# EAGLE board Bottom (EAGLE 7.6.0)
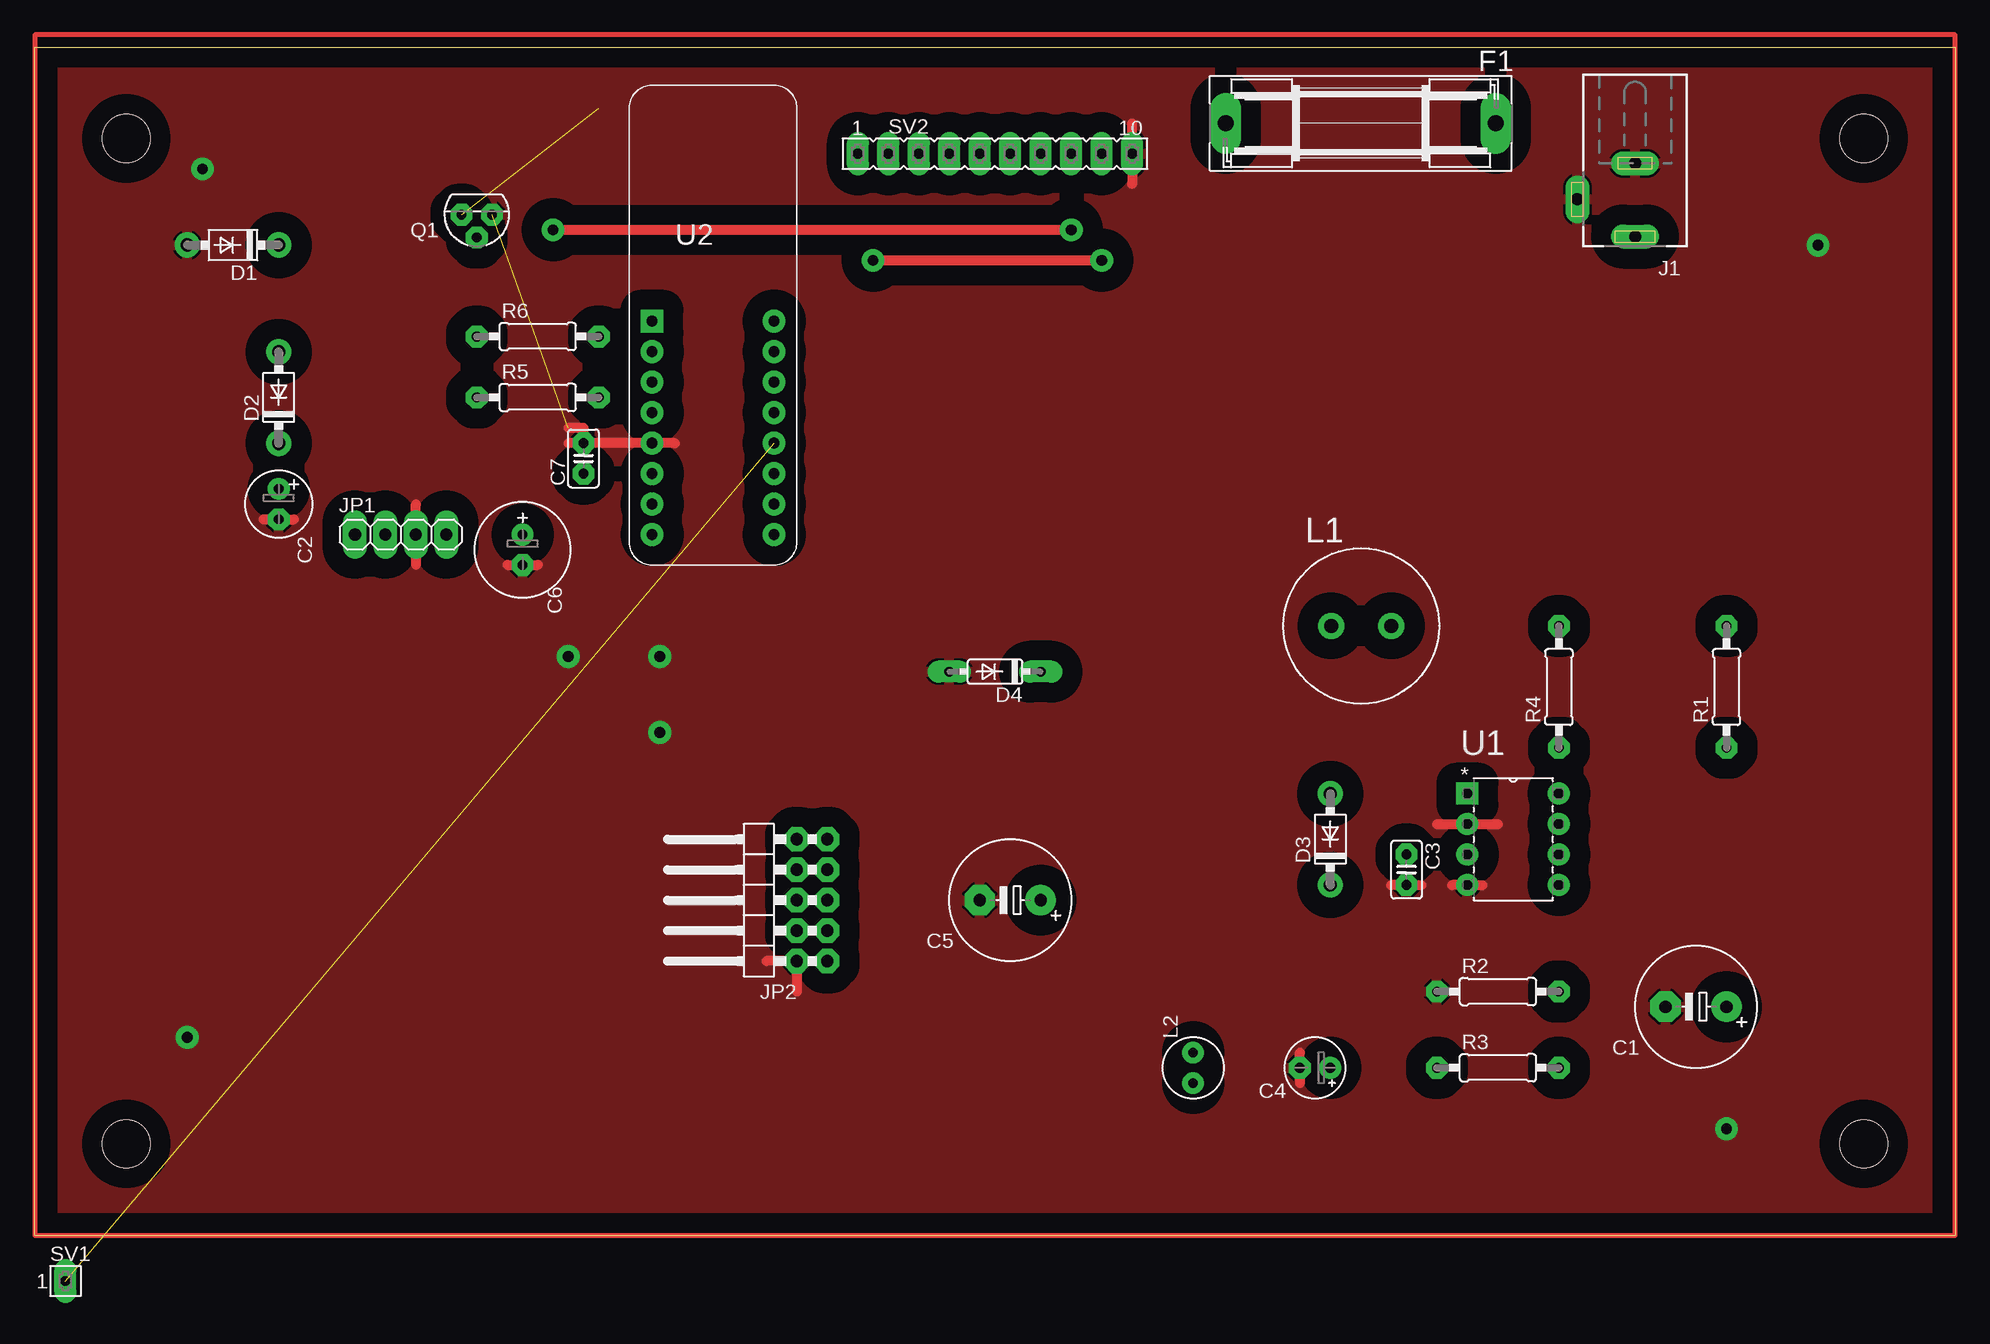
[diagram p0: board, top side]
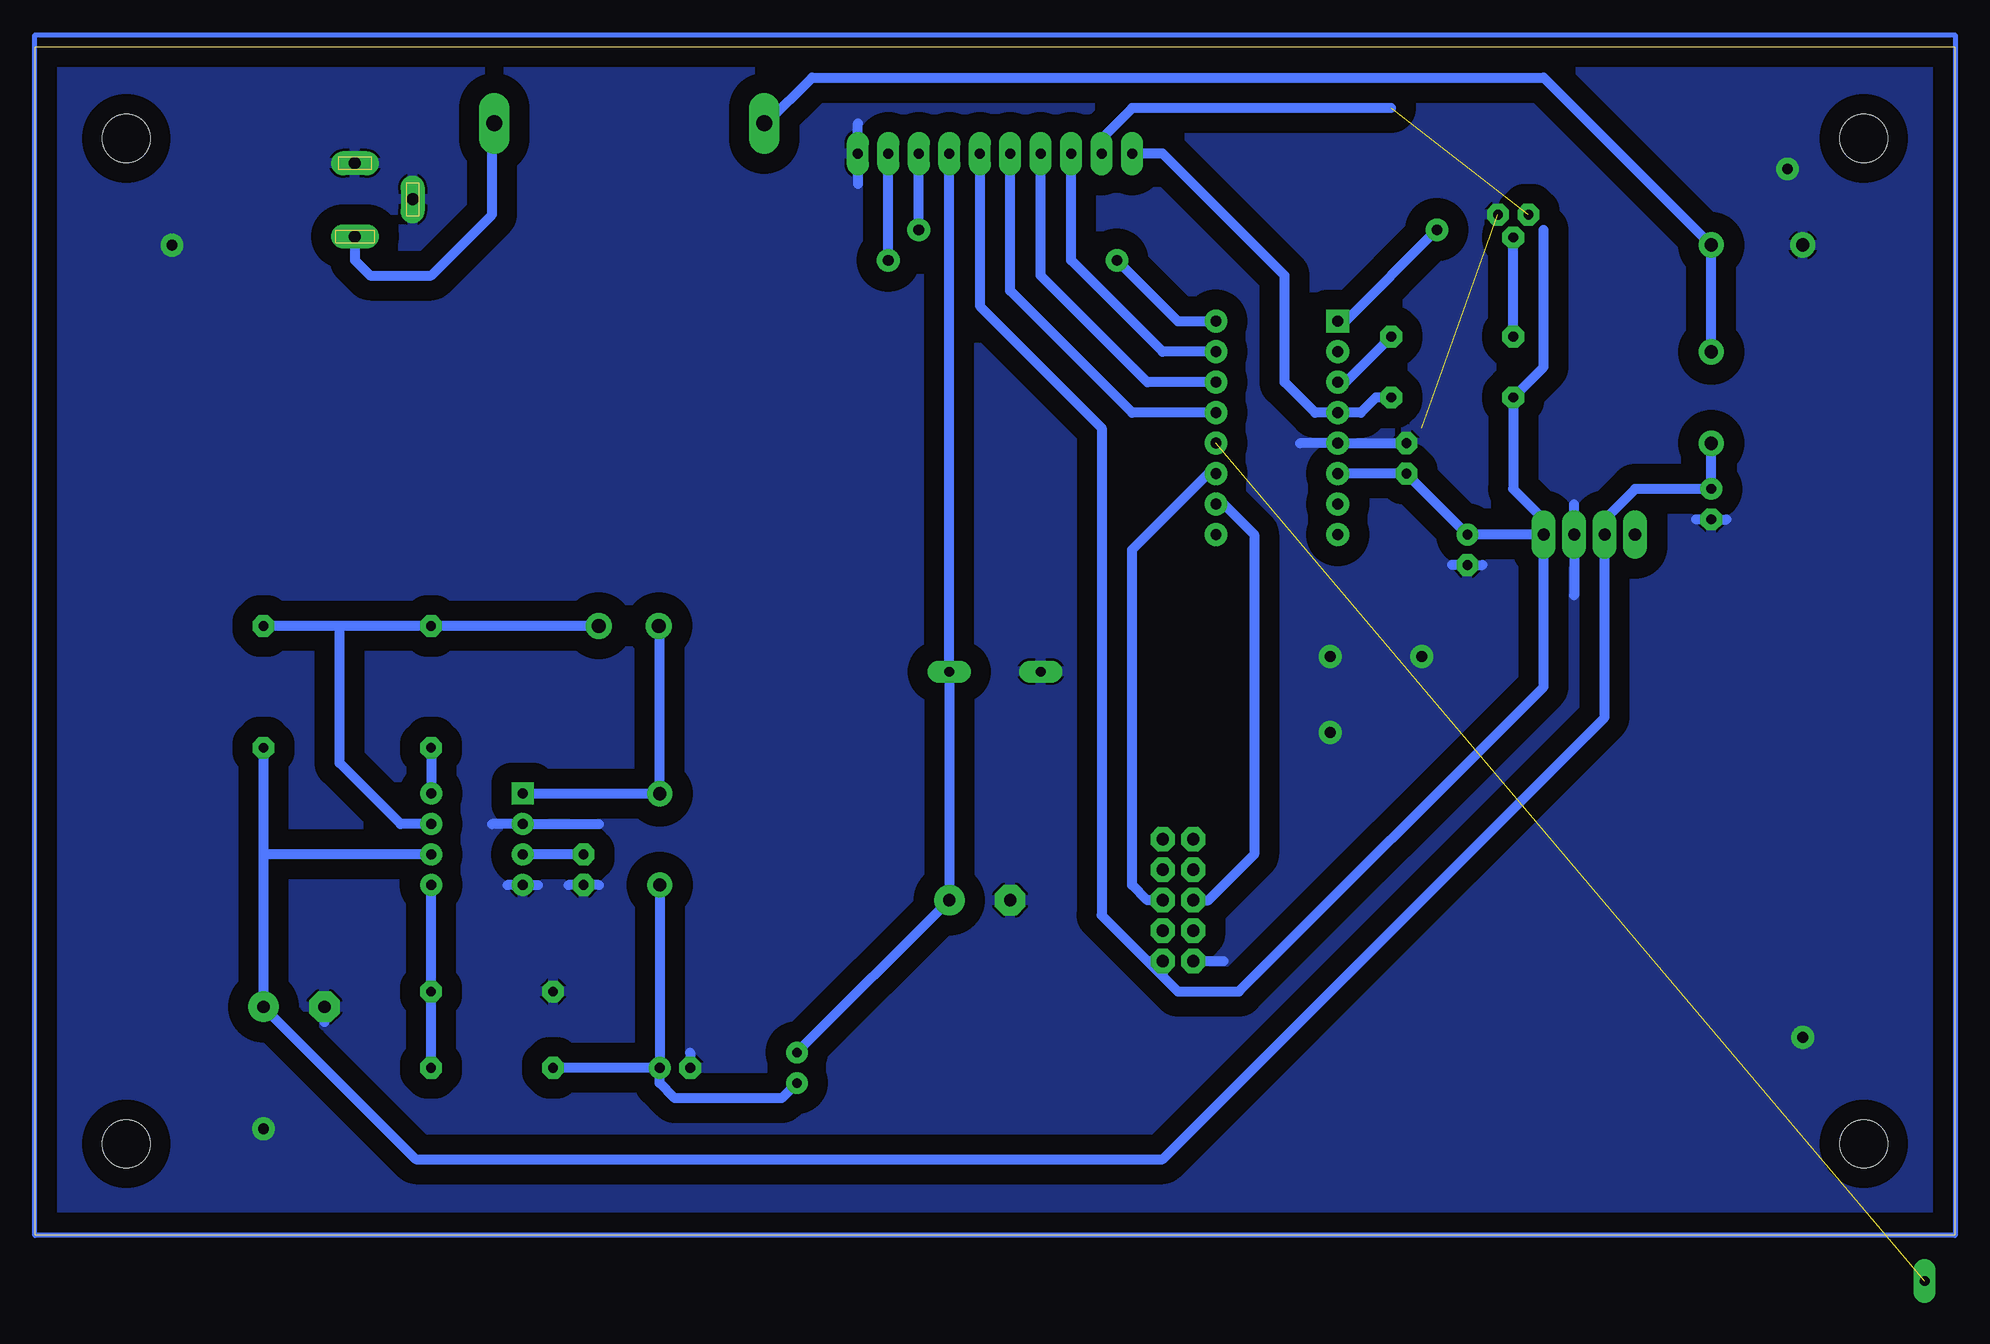
[diagram p1: board, bottom side, seen from below]

Size 160.02 x 99.06 mm. Coordinates in mm from the lower left corner, seen from the top.
Outline: 160,0 0,0 0,99.06 160.02,99.06 160.02,0
Copper layers (1*16): Top 0.035mm / dielectric 1.5mm / Bottom 0.035mm
Design rules "Line_Follower_Rules2": minimum track width 0.25mm, minimum drill 0.8mm, track to track 0.25mm, track to pad 0.25mm, pad to pad 0.25mm, via to via 0.25mm, smd to smd 5mil, copper to edge 1mm, drill to drill 0.5mm, minimum pad ring 0.5mm, minimum via ring 0.5mm, stop-mask expansion 4mil, vias tented up to drill 0mil, thermal gap 0.2mm
Holes 4 mm at 7.62,91.44 7.62,7.62 152.4,7.62 152.4,91.44

## Footprints (pad centres in the part's own frame; a part is rotated, then mirrored left to right if it is on the bottom)
E5-10 = drill 1.016 pad 2.54: + -2.54,0 | drill 1.016 pad 2.54 octagon: - 2.54,0
E2,5-6 = drill 0.813 pad 1.6: + -1.27,0 | drill 0.813 pad 1.6 octagon: - 1.27,0
C025-025X050 = drill 0.813 octagon: 1 -1.27,0; 2 1.27,0
E2,5-5 = drill 0.813 pad 1.6: + -1.27,0 | drill 0.813 pad 1.6 octagon: - 1.27,0
E2,5-8 = drill 0.813 pad 1.6: + -1.27,0 | drill 0.813 pad 1.6 octagon: - 1.27,0
DO41-7 = drill 1.118: A 3.81,0; C -3.81,0
DO35-7 = drill 0.813 long: A 3.81,0; C -3.81,0
SH22,5 = drill 1.321 pad 2.54 long: 1 -11.252,0; 2 11.252,0
DCJ0202 = drill 1 pad 2 long: 1 0,3.1; 2 4.8,0; 3 0,-3
1X04 = drill 1.016 long: 1 -3.81,0; 2 -1.27,0; 3 1.27,0; 4 3.81,0
2X05/90 = drill 1.016 octagon: 1 -5.08,-6.35; 2 -5.08,-3.81; 3 -2.54,-6.35; 4 -2.54,-3.81; 5 0,-6.35; 6 0,-3.81; 7 2.54,-6.35; 8 2.54,-3.81; 9 5.08,-6.35; 10 5.08,-3.81
IND_ELC10D = drill 1.194: 1 -5.004,0; 2 0,0
L2,5-5 = drill 0.813 pad 1.6: 1 -1.27,0; 2 1.27,0
TO92 = drill 0.813 octagon: 1 1.27,0; 2 0,1.905; 3 -1.27,0
0207/10 = drill 0.813 octagon: 1 -5.08,0; 2 5.08,0
FE05-1 = drill 0.813 long: 1 0,0
FE10 = drill 0.813 long: 1 -11.43,0; 2 -8.89,0; 3 -6.35,0; 4 -3.81,0; 5 -1.27,0; 6 1.27,0; 7 3.81,0; 8 6.35,0; 9 8.89,0; 10 11.43,0
DIP254P762X508-8 = drill 0.838 square: 1 -7.62,7.62 | drill 0.838: 2 -7.62,5.08; 3 -7.62,2.54; 4 -7.62,0; 5 0,0; 6 0,2.54; 7 0,5.08; 8 0,7.62
XMC_2_GO = drill 0.9 pad 1.676 square: 1 -5.715,0 | drill 0.9 pad 1.676: 2 -5.715,-2.54; 3 -5.715,-5.08; 4 -5.715,-7.62; 5 -5.715,-10.16; 6 -5.715,-12.7; 7 -5.715,-15.24; 8 -5.715,-17.78; 9 4.445,-17.78; 10 4.445,-15.24; 11 4.445,-12.7; 12 4.445,-10.16; 13 4.445,-7.62; 14 4.445,-5.08; 15 4.445,-2.54; 16 4.445,0

## Placement (x,y rotation side)
C1  LEAGUER1000  [E5-10]  138.43,19.05 180 top
C2  LELON47  [E2,5-6]  20.32,60.96 270 top
C3  K331K15X7RK5TH5V  [C025-025X050]  114.3,30.48 270 top
C4  MCGPR100V225M5X11  [E2,5-5]  106.68,13.97 180 top
C5  MCRH63V107M10X13  [E5-10]  81.28,27.94 180 top
C6  GJT1000  [E2,5-8]  40.64,57.15 270 top
C7  A104K15X7RF5TAA  [C025-025X050]  45.72,64.77 90 top
D1  1N5244B  [DO41-7]  16.51,82.55 180 top
D2  1N4001  [DO41-7]  20.32,69.85 90 top
D3  SR1100  [DO41-7]  107.95,33.02 90 top
D4  BZX79-C51 SMALL  [DO35-7]  80.01,46.99 180 top
F1  [SH22,5]  110.49,92.71 180 top
J1  DCJ0202  [DCJ0202]  133.35,86.36 180 top
JP1  [1X04]  30.48,58.42 0 top
JP2  [2X05/90]  59.69,27.94 90 top
L1  ELC10D181E  [IND_ELC10D]  113.03,50.8 0 top
L2  11R102C  [L2,5-5]  96.52,13.97 90 top
Q1  BC516  [TO92]  36.83,85.09 180 top
R1  3.9  [0207/10]  140.97,45.72 90 top
R2  1k  [0207/10]  121.92,20.32 0 top
R3  30k  [0207/10]  121.92,13.97 0 top
R4  180  [0207/10]  127,45.72 90 top
R5  22k  [0207/10]  41.91,69.85 0 top
R6  1k  [0207/10]  41.91,74.93 0 top
SV1  [FE05-1]  2.54,-3.81 0 top  (outside the outline)
SV2  [FE10]  80.01,90.17 0 top
U1  MC34063AP  [DIP254P762X508-8]  127,29.21 0 top
U2  XMC_2_GO  [XMC_2_GO]  57.15,76.2 0 top

## Library data of the parts
C1-C7 D1-D4 L2 = MyLib
F1 = fuse; MF: SCHURTER; MPN: 0031.8201; OC_FARNELL: 1162740; OC_NEWARK: 96F8317
J1 = con-jack; OC_FARNELL: unknown; OC_NEWARK: unknown
JP1 JP2 = pinhead
L1 = Panasonic-ELC; CURRENTRATING: 1.3A; MPN: ELC10D181E; OC_FARNELL: 1749071; OC_NEWARK: 32R9062; PACKAGE: Radial Lead-TH; SUPPLIER: PANASONIC
Q1 = transistor-pnp
R1-R6 = resistor
SV1 = MyLib; OC_FARNELL: unknown; OC_NEWARK: unknown
SV2 = con-lsta; OC_FARNELL: unknown; OC_NEWARK: unknown
U1 = MC34063; MPN: MC34063AP; OC_FARNELL: 1053579; OC_NEWARK: 04K3500; PACKAGE: PDIP-8; SUPPLIER: Texas Instruments
U2 = Line_Follower_LIBV3

## Nets
3.3V: C6.+ C7.1 JP1.4 JP2.1 R5.1 SV2.6 U2.6
5V: L1.2 R1.2 R4.2 U1.7
12V: C1.+ C2.+ D2.C JP1.2 R1.1 U1.6
40V: C5.+ D4.C L2.2 SV2.7
BLANK: SV1.1 U2.12
BUTT: SV2.9 U2.16
CLK: SV2.3 U2.15
DATA: SV2.5 U2.13
FIL: Q1.1 SV2.2
GND: C1.- C2.- C3.2 C4.- C5.- C6.- C7.2 D1.A D4.A J1.2 J1.3 JP1.3 JP2.2 Q1.3 R2.1 SV2.10 U1.2 U1.4 U2.5
LIGHT: R5.2 SV2.1 U2.4
LOAD: SV2.4 U2.14
N$1: Q1.2 R6.1
N$2: R6.2 U2.3
N$3: F1.1 J1.1
N$6: C4.+ D3.C L2.1 R3.1
N$9: C3.1 U1.3
N$14: R2.2 R3.2 U1.5
N$21: D3.A L1.1 U1.1
N$42: R4.1 U1.8
POW: D1.C D2.A F1.2
POWER: SV2.8 U2.1
SCL: JP2.5 U2.11
SDA: JP2.6 U2.10

## Tracks (layer width: path | path; a pad name or v marks a point on that pad's centre or on a via)
3.3V
  Bottom 0.813: JP1.4 C6.+ C7.1 U2.6 | JP1.4 34.29,59.69 36.83,62.23 R5.1 34.29,72.39 34.29,83.82 | 66.04,21.59 JP2.1 67.31,22.86 | 66.04,21.59 64.77,20.32 59.69,20.32 34.29,45.72 JP1.4 | SV2.6 81.28,77.47 71.12,67.31 71.12,26.67 68.58,24.13 67.31,22.86 | 66.04,21.59 67.31,22.86
5V
  Bottom 0.813: L1.2 R4.2 134.62,50.8 | 134.62,50.8 R1.2 | U1.7 129.54,34.29 134.62,39.37 134.62,50.8
12V
  Bottom 0.813: 29.21,57.15 JP1.2 | R1.1 140.97,31.75 | 140.97,31.75 C1.+ 128.27,6.35 66.04,6.35 29.21,43.18 JP1.2 | JP1.2 29.21,59.69 26.67,62.23 C2.+ D2.C | U1.6 140.97,31.75
40V
  Bottom 0.813: L2.2 C5.+ D4.C SV2.7
BLANK  (1 unrouted)
BUTT  (via drill 0.9 pad 1.78)
  Top 0.813: v69.85,81.28 v88.9,81.28
  Bottom 0.813: v88.9,81.28 SV2.9 | v69.85,81.28 64.77,76.2 U2.16
CLK
  Bottom 0.813: SV2.3 73.66,81.28 66.04,73.66 U2.15
DATA
  Bottom 0.813: U2.13 68.58,68.58 78.74,78.74 SV2.5
FIL  (1 unrouted)
  Bottom 0.813: SV2.2 71.12,91.44 68.58,93.98 46.99,93.98
GND  (via drill 0.9 pad 1.78)  (1 unrouted)
  Top 0.813: 19.05,59.69 C2.- 21.59,59.69 | 31.75,55.88 JP1.3 31.75,60.96 | 39.37,55.88 C6.- 41.91,55.88 | C7.2 44.45,66.04 | C7.2 45.72,67.31 44.45,67.31 | 53.34,66.04 C7.2 | 91.44,92.71 SV2.10 91.44,87.63 | 60.96,22.86 JP2.2 63.5,20.32 | 105.41,15.24 C4.- 105.41,12.7 | 113.03,29.21 C3.2 115.57,29.21 | 118.11,29.21 U1.4 120.65,29.21 | 116.84,34.29 U1.2 121.92,34.29
  Bottom 0.813: 54.61,66.04 U2.5 C7.2 | 31.75,60.96 JP1.3 31.75,53.34 | 39.37,55.88 C6.- 41.91,55.88 | JP2.2 60.96,22.86 | 113.03,34.29 U1.2 121.92,34.29 | 19.05,59.69 C2.- 21.59,59.69 | 91.44,87.63 SV2.10 91.44,92.71 | C1.- 135.89,17.78 | 105.41,15.24 C4.- | 113.03,29.21 C3.2 115.57,29.21 | 118.11,29.21 U1.4 120.65,29.21
  other vias: 13.97,88.9 12.7,16.51 148.59,82.55 140.97,8.89 44.45,48.26 52.07,48.26 52.07,41.91
  pour Bottom (isolate 1.676): 0,99.06 160.02,99.06 160.02,0 0,0
  pour Top (isolate 1.676): 0,99.06 160.02,99.06 160.02,0 0,0
LIGHT
  Bottom 0.813: R5.2 48.26,69.85 49.53,68.58 U2.4 53.34,68.58 55.88,71.12 55.88,80.01 66.04,90.17 SV2.1
LOAD
  Bottom 0.813: U2.14 67.31,71.12 76.2,80.01 SV2.4
N$1
  Bottom 0.813: R6.1 Q1.2
N$2
  Bottom 0.813: U2.3 50.8,71.12 R6.2
N$3
  Bottom 0.813: J1.1 133.35,81.28 132.08,80.01 127,80.01 121.92,85.09 121.92,92.53 F1.1
N$4
  Bottom 0.406: 0,0 160.02,0 160.02,100.08 0,100.08 0,0
N$5
  Top 0.406: 0,0 160.02,0 160.02,100.08 0,100.08 0,0
N$6
  Bottom 0.813: C4.+ 107.95,12.7 106.68,11.43 97.79,11.43 L2.1 | C4.+ R3.1 | D3.C C4.+
N$9
  Bottom 0.813: C3.1 U1.3
N$14
  Bottom 0.813: R3.2 R2.2 U1.5
N$21
  Bottom 0.813: L1.1 107.95,50.72 D3.A U1.1
N$42
  Bottom 0.813: R4.1 U1.8
POW
  Bottom 0.813: F1.2 99.06,92.71 95.25,96.52 34.29,96.52 D1.C D2.A
POWER  (via drill 0.9 pad 1.78)
  Top 0.813: v43.18,83.82 v86.36,83.82
  Bottom 0.813: U2.1 50.8,76.2 v43.18,83.82 | v86.36,83.82 SV2.8
SCL
  Bottom 0.813: U2.11 62.23,63.5 68.58,57.15 68.58,29.21 67.31,27.94 JP2.5
SDA
  Bottom 0.813: U2.10 60.96,60.96 58.42,58.42 58.42,31.75 62.23,27.94 JP2.6